# Altium PCB DetectorOptode.PcbDoc
Units mm, origin at the board's own origin, x right, y up, seen from the top; angles counter-clockwise.
Board outline 16 x 16 mm, 2 copper layers (Top Layer, Bottom Layer); 10 components, 7 nets, 32 pads, 11 vias.
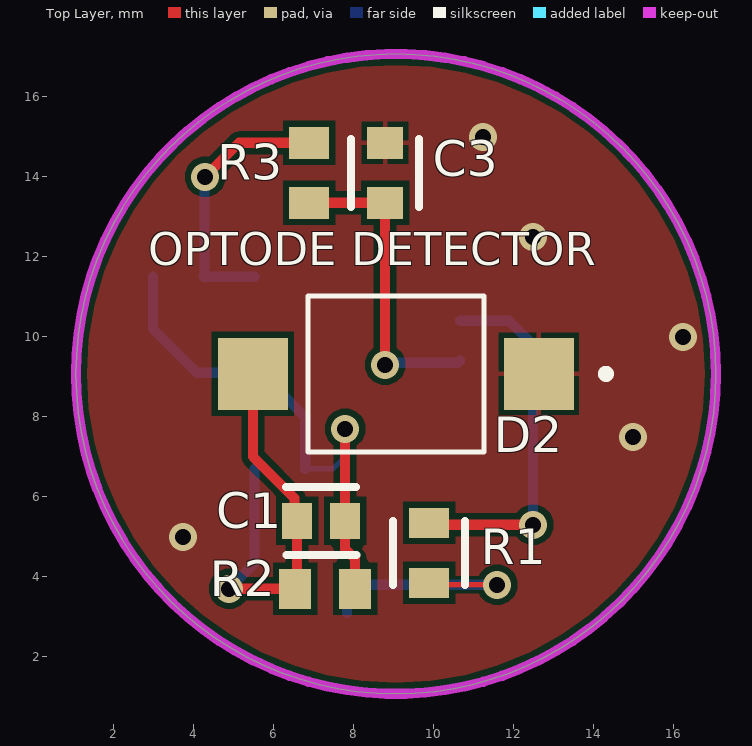
[diagram p0: Top Layer view]
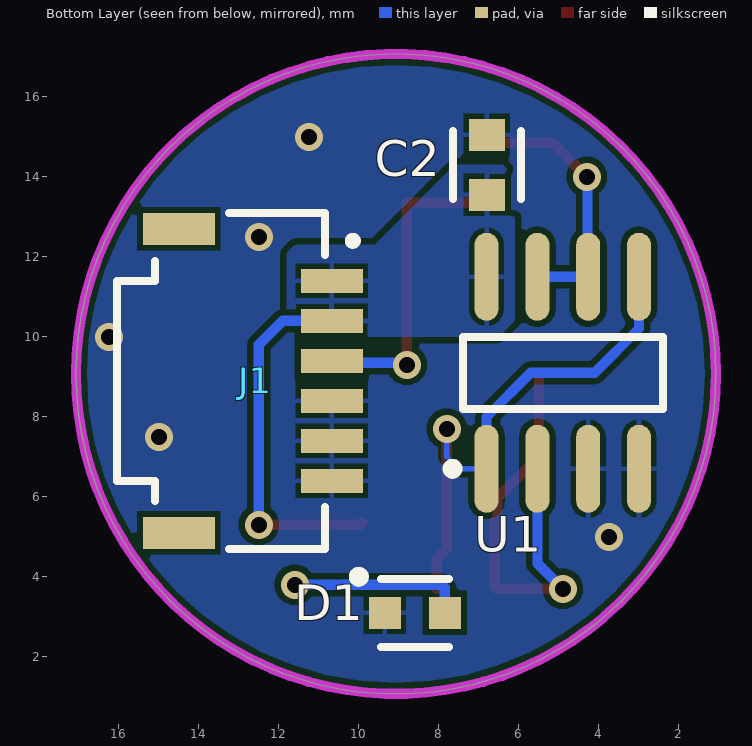
[diagram p1: Bottom Layer view, seen from below]
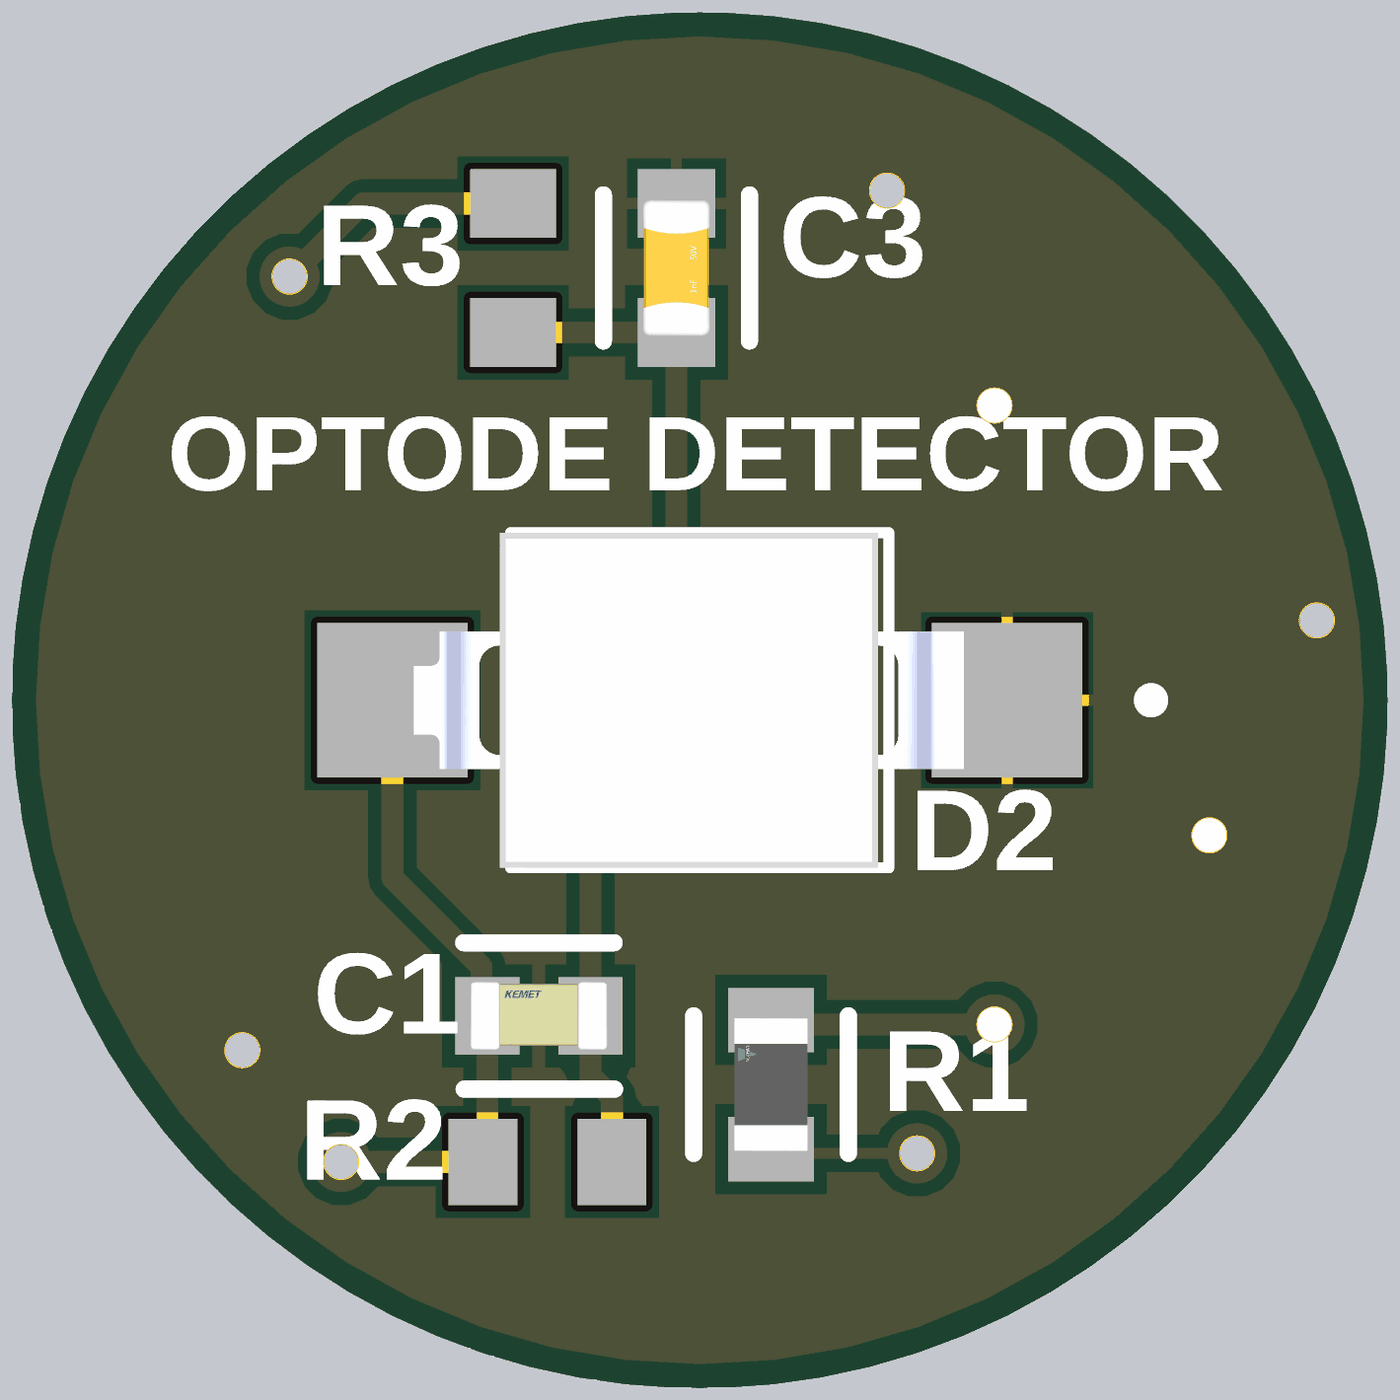
[diagram p2: 3D render of the assembled board from above, using the file's embedded part models]
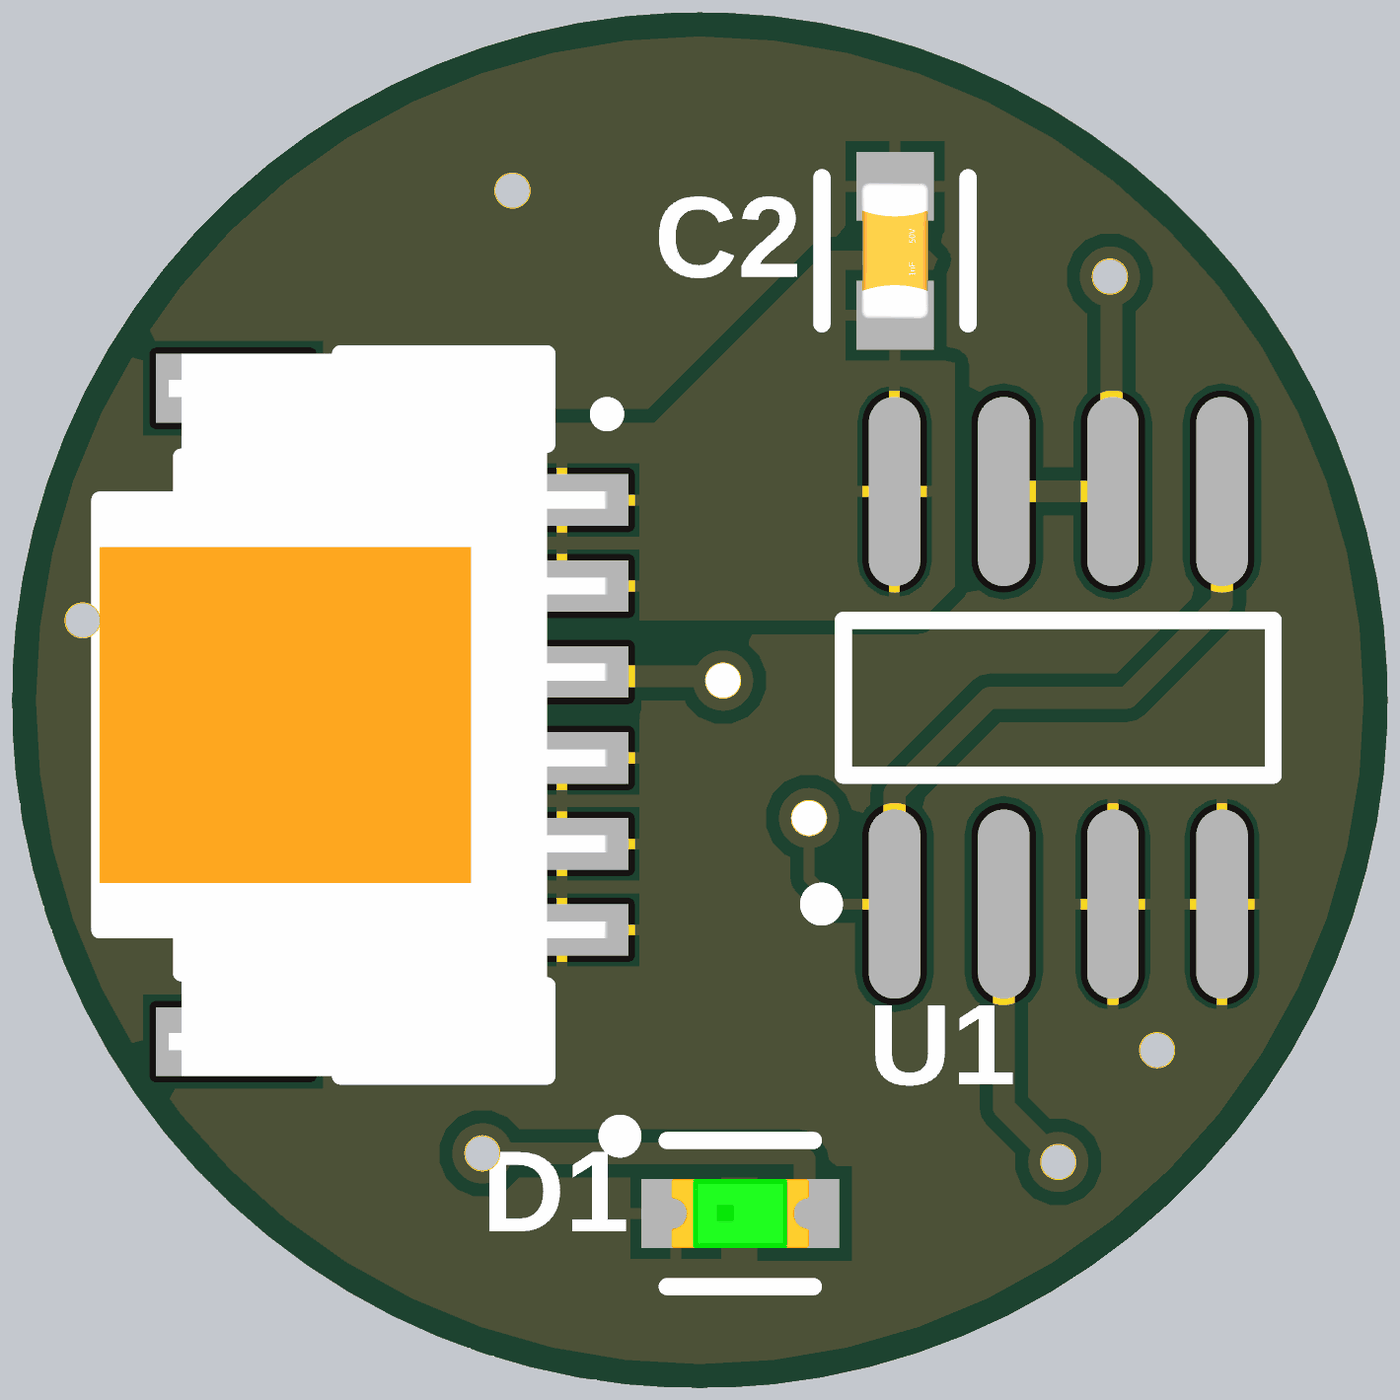
[diagram p3: 3D render of the assembled board from below, using the file's embedded part models]

## Layer stack, top to bottom
Top Solder: solder mask 0.0102, Solder Resist, Dk 3.5
Top Layer: signal copper 0.0356
Dielectric 1: dielectric 0.32, FR-4, Dk 4.8
Bottom Layer: signal copper 0.0356
Bottom Solder: solder mask 0.0102, Solder Resist, Dk 3.5

## Board outline
9.071,1.071 cw(c9.071,9.071) 1.071,9.071 cw(c9.071,9.071) 9.071,17.071 cw(c9.071,9.071) 17.071,9.071 cw(c9.071,9.071)

## Design rules (kind name [scope] priority, off if disabled: settings)
BoardOutlineClearance [All] p1: gap=0.2 ignorepadtopadclearanceinfootprint=FALSE
Clearance [All] p1: gap=0.15 ignorepadtopadclearanceinfootprint=FALSE except(0.127: Arc-Text Track-Text SMDPad-Text THPad-Text Via-Text Fill-Text Poly-Text Region-Text Text-Text; 0.25: Arc-Hole Track-Hole SMDPad-Hole THPad-Hole Via-Hole Fill-Hole Poly-Hole Region-Hole Text-Hole; 0.275: Arc-Via Track-Via SMDPad-Via THPad-Via Via-Via; 0.33: Arc-THPad Track-THPad)
ComponentClearance [All] p1: gap=0.127 collisioncheckmode=3 verticalgap=0.127 showdistances=TRUE
DiffPairsRouting [All] p1: maxlimit=0.254 minlimit=0.127 mostfreqgap=0.127 toplayer_minwidth=0.127 toplayer_maxwidth=25.4 toplayer_prefwidth=0.127 bottomlayer_minwidth=0.127 bottomlayer_maxwidth=25.4 bottomlayer_prefwidth=0.127 maxuncoupledlength=12.7
Height [All] p1: minheight=0 maxheight=1816.048 prefheight=12.7
HoleSize [All] p1: absolutevalues=TRUE maxlimit=6.3 minlimit=0.3 maxpercent=80.000 minpercent=20.000
HoleToHoleClearance [All] p1: gap=0.3 allowstackedmicrovias=FALSE
MinimumAnnularRing [All] p1: minimumring=0.076
MinimumSolderMaskSliver [All] p1: minsoldermaskwidth=0
PlaneClearance [All] p1: clearance=0.127
PlaneConnect PlaneConnectPowerPads [InPadClass('PowerPads')] p1: planeconnectstyle=Direct reliefexpansion=0.508 reliefentries=4 reliefconductorwidth=0.254 reliefairgap=0.254
PlaneConnect [All] p2: pad.planeconnectstyle=Relief pad.reliefexpansion=0.3 pad.reliefentries=4 pad.reliefconductorwidth=0.127 pad.reliefairgap=0.127 via.planeconnectstyle=Direct via.reliefexpansion=0.3 via.reliefentries=4 via.reliefconductorwidth=0.127 via.reliefairgap=0.127
PolygonConnect PolygonConnectPowerPads [All vs (InPadClass('PowerPads'))] p1: connectstyle=Direct reliefconductorwidth=0.254 reliefentries=4 polygonreliefangle="90 Angle" airgapwidth=0.254
PolygonConnect [All] p2: thpad.connectstyle=Relief thpad.reliefconductorwidth=0.127 thpad.reliefentries=4 thpad.polygonreliefangle="90 Angle" thpad.airgapwidth=0.127 smdpad.connectstyle=Relief smdpad.reliefconductorwidth=0.127 smdpad.reliefentries=4 smdpad.polygonreliefangle="90 Angle" smdpad.airgapwidth=0.127 via.connectstyle=Direct via.reliefconductorwidth=0.127 via.reliefentries=4 via.polygonreliefangle="90 Angle" via.airgapwidth=0.127
RoutingVias [All] p1: holewidth=0.3 width=0.6 viastyle="Through Hole" minholewidth=0.3 minwidth=0.6 maxholewidth=0.6 maxwidth=6.6
SilkToSilkClearance [All] p1: silktosilkclearance=0
SilkToSolderMaskClearance [IsPad] p1: minsilkscreentomaskgap=0.127 clearancetoexposedcopper=TRUE
SolderMaskExpansion [All] p1: expansion=0.075 istentingtop=FALSE
Width [All] p1: maxlimit=25.4 minlimit=0.127 preferedwidth=0.127 minimp=50.000000 maximp=50.000000 favimp=50.000000
20 further rules are at their usual default settings.

## Classes and differential pairs
component class DetectorOptode: C1 C2 C3 D1 D2 J1 R1 R2 R3

## Components (designator, comment, footprint, x,y, rotation, side; value= is the part's Value field where it differs from the comment)
C1 "C0603C201J5GACTU" FP-C0603C-CF-MFG 7.2,5.4 r0 top value="200 pF"
C2 "CC0603KRX7R7BB104" FP-CC0603-DA-MFG 6.8,14.3 r90 bottom value="100 nF"
C3 "CC0603KRX7R7BB104" FP-CC0603-DA-MFG 8.8,14.1 r90 top value="100 nF"
D1 "LTST-C190GKT" FP-LTST-C190GKT-MFG 8.6,3.1 r180 bottom
D2 "VBPW34S" XDCR_VBPW34S 9.071,9.071 r180 top
J1 "T1M-06-X-SH-L" SAMTEC_T1M-06-X-SH-L 10.85,8.9 r270 bottom
R1 "CRCW0603200RFKEA" FP-CRCW0603-e3-MFG 9.9,4.6 r90 top
R2 "RC0603FR-0760K4L" RESC1608X55X25ML10T15 7.3,3.7 r0 top
R3 "RC0603JR-070RL" RESC1608X55X25ML10T15 6.9,14.1 r270 top
U1 "AD8616ARZ-REEL" ADI-R-8_N 4.9,9.1 r90 bottom

## Footprints (in the part's own frame and the unit in brackets; to place one, negate y for a bottom-side part, rotate by r counter-clockwise, add the part's x,y. Pads: shape width x height; smd on the part's side, far side on the other; paste and mask are expansions set on the pad)
ADI-R-8_N [mm] "SOIC, 8-Leads, Body 4.9x3.9mm, Pitch 1.27mm, IPC Medium Density"
  oval 2.2x0.6 smd: 1(-2.4,1.905) 2(-2.4,0.635) 3(-2.4,-0.635) 4(-2.4,-1.905) 5(2.4,-1.905) 6(2.4,-0.635) 7(2.4,0.635) 8(2.4,1.905)
  silkscreen extent -2.52,-2.5 0.9,2.88, body extent 10.2,-4.9 14.2,0.1, height 1.75
FP-C0603C-CF-MFG [mm]
  rect 0.75x0.9 smd paste+0 mask+0: 1(-0.6,0) 2(0.6,0)
  silkscreen extent -0.87,-0.85 0.88,0.85, body extent -1.2,-0.6 1.2,0.6, height 0.25
FP-CC0603-DA-MFG [mm]
  rect 0.8x0.9 smd paste+0 mask+0: 1(-0.75,0) 2(0.75,0)
  silkscreen extent -0.85,-0.85 0.85,0.85, body extent -0.8,-0.4 0.8,0.4, height 0.9
FP-CRCW0603-e3-MFG [mm]
  rect 0.75x1 smd paste+0 mask+0: 1(-0.75,0) 2(0.75,0)
  silkscreen extent -0.8,-0.9 0.8,0.9, body extent -0.77,-0.43 0.77,0.43, height 0.5
FP-LTST-C190GKT-MFG [mm]
  rect 0.8x0.8 smd paste+0 mask+0: 1(-0.75,0) 2(0.75,0)
  silkscreen extent -1.53,-0.85 0.85,1.02, body extent -0.8,-0.4 0.8,0.4, height 0.9
RESC1608X55X25ML10T15 [mm] "Chip Resistor, 2-Leads, Body 1.60x0.80mm, IPC Low Density"
  rect 0.8x1 smd: 1(-0.75,0) 2(0.75,0)
  body extent -0.85,-0.45 0.85,0.45, height 0.55
SAMTEC_T1M-06-X-SH-L [mm]
  rect 0.6x1.55 smd: 01(-2.5,0.175) 02(-1.5,0.175) 03(-0.5,0.175) 04(0.5,0.175) 05(1.5,0.175) 06(2.5,0.175)
  rect 0.8x1.8 smd: S1(-3.8,-3.65) S2(3.8,-3.65)
  silkscreen extent -4.2,-5.2 4.2,0.8, body extent -4.2,-5.2 4.2,0.7, height 4.72
XDCR_VBPW34S [mm]
  rect 1.75x1.8 smd: A(3.575,0) K(-3.575,0)
  silkscreen extent -5.35,-1.95 2.2,1.95, body extent -3.07,-1.95 3.33,1.95, height 1.4

## Part data
C1: library part CMP-1035-01444-3, "CAP CER 200PF 50V 5% NP0 0603", Capacitance="200 pF", Manufacturer=KEMET, Package=C0603C-CF, Temperature="-55°C to +125°C", Temperature Characteristic=C0G, Temperature Coefficient=30ppm/°C, Temperature Range High=+125°C, Temperature Range Low=-55°C, Tolerance=0.05, Voltage Rating="50 V", Automotive=Yes, Automotive Grade="Grade 1", Category=Cap, ComponentLink2Description=Datasheet, ComponentLink2URL=https://api.kemet.com/component-edge/download/datasheet/C0603C100J5GACAUTO.pdf, Device Class L1="Passive Components", Device Class L2=Capacitors, Device Class L3="Ceramic Capacitors", Digikey Description="CAP CER 200PF 50V 5% NP0 0603", Height=0.87mm, Lead Free=Yes, Manufacturer Part Number=C0603C201J5GACTU, Material=Ceramic, Mouser Description="Multilayer Ceramic Capacitors MLCC - SMD/SMT 50volts 200pF C0G 5%", Octopart=https://octopart.com/c0603c201j5gactu-kemet-9143917, RoHS=TRUE
C2 C3: library part CMP-2000-05002-2, "CAP CER 0.1UF 16V X7R 0603", Capacitance="100 nF", Manufacturer=YAGEO, Package=CC0603-DA, Temperature="-55°C to +125°C", Temperature Characteristic=X7R, Temperature Coefficient=15%, Temperature Range High=+125°C, Temperature Range Low=-55°C, Tolerance=0.1, Voltage="16 V", Automotive=No, Category=Cap, ComponentLink2Description=Datasheet, ComponentLink2URL=http://www.yageo.com/documents/recent/UPY-GPHC_X7R_6.3V-to-50V_18.pdf, Device Class L1="Passive Components", Device Class L2=Capacitors, Device Class L3="Ceramic Capacitors", Digikey Description="CAP CER 0.1UF 16V X7R 0603", Footprint Url=http://www.yageo.com/exep/pages/download/literatures/UPY-C_GEN_24.pdf, Height=0.9mm, Lead Free=Yes, Manufacturer Part Number=CC0603KRX7R7BB104, Material=Ceramic, Mouser Description="Multilayer Ceramic Capacitor, CC Series, 0.1 - F, - 10%, X7R, 16 V, 0603 [1608 Metric]", Octopart=https://octopart.com/cc0603krx7r7bb104-yageo-192941, RoHS=TRUE, Voltage Rating="16 V"
D1: library part CMP-22017-000005-2, "LED GREEN CLEAR CHIP SMD", Case Code (Imperial)=0603, Case Code (Metric)=1608, Color=Green, Forward Current=30mA, Forward Voltage=2.1V, Lens Color=Colorless, Max Operating Temperature=85°C, Min Operating Temperature=-55°C, Package Quantity=1, Power Dissipation=100mW, Reverse Voltage=5V, Test Current=10mA, Voltage=2V, Case/Package=0603, Depth=0.8mm, Dominant Wavelength=569nm, Height=0.8mm, Illumination Color=Green, Lead Free="Lead Free", Length=1.6mm, Lens Style=Clear, Lens Transparency=Clear, Luminous Intensity=6mcd, Mount="Surface Mount", Number of Elements=1, Number of LEDs=1, Number of Pins=2, Packaging="Tape and Reel", Power Rating=100mW, Radiation Hardening=No, Viewing Angle=130°, Wavelength=565nm, Width=0.8mm
D2: "Photodiode 940nm 100ns 130Â° 2-SMD, Gull Wing", Package="SMD-2 Vishay", Availability=Unavailable, MF=Vishay, MP=VBPW34S, Price=None, SnapEDA_Link=https://www.snapeda.com/parts/VBPW34S/Vishay%20Semiconductor%20Opto%20Division/view-part/139260/?ref=snap
J1: "Connector Header Surface Mount, Right Angle 6 position 0.039\" (1.00mm)", Package=None, Availability=Unavailable, MF=Samtec, MP=T1M-06-X-SH-L, Price=None
R1: library part CMP-2000-03062-2, "RES Thick Film, 200Ω, 1%, 0.1W, 100ppm/°C, 0603", Case Code (Imperial)=0603, Case Code (Metric)=1608, Max Operating Temperature=155°C, Min Operating Temperature=-55°C, Package Quantity=5000, Power Rating=100mW, Resistance=200R, Temperature Coefficient=100ppm/°C, Tolerance=1%, Voltage Rating=75V, Case/Package=0603, Composition="Thick Film", Contact Plating=Tin, Depth=0.85mm, Height=0.45mm, Lead Free="Lead Free", Length=1.55mm, Military Standard=Not, Number of Pins=2, Packaging="Tape and Reel", Termination=SMD/SMT, Voltage Rating (DC)=75V, Weight=7.1E-05oz, Width=0.85mm
R2: library part CMP-2000-04099-1, Manufacturer=Yageo, Resistance=60.4k, Part Number=RC0603FR-0760K4L
R3: library part CMP-2100-03667-1, "Chip Resistor, 0 Ohm, +/- 5%, 0.1 W, -55 to 155 degC, 0603 (1608 Metric), RoHS, Tape and Reel", Case Code (Imperial)=0603, Case Code (Metric)=1608, Manufacturer=Yageo, Max Operating Temperature=155degC, Min Operating Temperature=-55degC, Package Description="2-Pin Surface Mount Device, Body 1.6 x 0.8 mm", Package Quantity=5000, Power Rating=100mW, Resistance=0mOhm, Temperature Coefficient=200ppm/degreesC, Tolerance=5%, Voltage Rating=50V, Case/Package=0603, Composition=ThickFilm, Contact Plating=Tin, Datasheet URL=http://www.yageo.com/NewPortal/yageodocoutput?fileName=/pdf/R-Chip/PYu-RC_Group_51_RoHS_L_5.pdf, Datasheet Version="Rev. 5, 10/2016", Depth=0.8mm, Height=0.45mm, Lead Free=LeadFree, Length=1.6mm, Manufacturer URL=http://www.yageo.com/, Military Standard=Not, Number of Pins=2, Package Reference=0603, Packaging=TapeandReel, Radiation Hardening=No, REACH SVHC=NoSVHC, RoHSCompliant=true, Termination=SMD/SMT, Voltage Rating (DC)=50V, Width=0.8mm
U1: library part CMP-0384-00619-1, "Double Channel Wide Bandwidth Operational Amplifier, 24 MHz BW, 12 V/us SR, Industrial, 8-pin SOIC (R-8), Reel", Amplifiers Per Package=2, Generic Part Number=AD8616, Input Bias Current=200fA, Input Offset Voltage=23uV, Manufacturer="Analog Devices", Code_JEDEC=MS-012-AA, ComponentLink1Description="Manufacturer URL", ComponentLink1URL=http://www.analog.com/en/index.html, ComponentLink2Description=Datasheet, ComponentLink2URL=http://www.analog.com/static/imported-files/data_sheets/AD8615_8616_8618.pdf, ComponentLink3Description="Package Specification", ComponentLink3URL=http://www.analog.com/static/imported-files/packages/PKG_PDF/SOIC_Narrow%20(R)/R_8.pdf, DatasheetVersion="Rev. E", Iq/Amp=2mA, Mounting Technology="Surface Mount", PackageDescription="8-Pin Standard Small Outline Package, Body 3.9 x 4.9 mm, Pitch 1.27 mm", PackageReference=R-8, PackageVersion=060506-A, PartNumber=AD8616ARZ-REEL, Slew Rate=12V/us, Small Signal Bandwidth=24MHz, V Span Max=6V, V Span Min=2.7V

## Via types
v1: diameter 0.7, hole 0.4, Top Layer to Bottom Layer, tented both sides, 11 vias

## Nets (pads, with @x,y where several pads share a name; then routed paths per layer and width w, separated by ;. In a path a pad name is that pad's centre, name@x,y a point inside that pad or via, vN(x,y) a via of type N, cw(c..) or ccw(c..) an arc to the next point about the centre after c; other vN are vias at no path point)
3V3: C2.1 J1.01 J1.02 R1.2 U1.8 | length 9.2
  Top Layer w0.254: R1.2 9.95,5.3 v1(12.5,5.3)
  Bottom Layer w0.254: J1.02 11.9,10.4 12.5,9.8 v1(12.5,5.3)
GND: C2.2 C3.2 D1.1 D2.K J1.04 J1.05 J1.06 U1.3 U1.4
  other v1: 3.75,5 15,7.5 16.25,10 12.5,12.5 11.25,15
NetC1_1: C1.1 D2.A R2.1 U1.2 | length 10.8
  Top Layer w0.254: v1(4.9,3.7) R2.1 6.6,3.75 C1.1 6.534,5.466 6.534,5.966 5.496,7.004 D2.A
  Bottom Layer w0.254: v1(4.9,3.7) 5.535,4.335 U1.2
NetC1_2: C1.2 R2.2 U1.1 U1.5 | length 13.2
  Top Layer w0.254: v1(7.8,7.7) C1.2 7.8,4.7 8.05,4.45 R2.2
  Bottom Layer w0.127: U1.1 7.5,6.7 7.8,7 v1(7.8,7.7)
  Bottom Layer w0.254: U1.5 2.995,10.205 4.1,9.1 5.7,9.1 6.805,7.995 U1.1
NetD1_2: D1.2 R1.1 | length 6.1
  Top Layer w0.127: R1.1 9.95,3.8 v1(11.6,3.8)
  Bottom Layer w0.254: D1.2 7.85,3.726 7.924,3.8 v1(11.6,3.8)
NetR3_1: R3.1 U1.6 U1.7 | length 6.7
  Top Layer w0.254: v1(4.3,14) 5.15,14.85 R3.1
  Bottom Layer w0.254: v1(4.3,14) 4.283,13.983 4.283,11.518 U1.6 U1.7
OptodeOutputVoltage: C3.1 J1.03 R3.2 | length 7.9
  Top Layer w0.254: R3.2 C3.1 v1(8.8,9.3)
  Bottom Layer w0.254: v1(8.8,9.3) 8.85,9.35 10.625,9.35 J1.03
pads on no net: J1.S1 J1.S2

## Polygon pours and split planes (outlines as drawn)
GND on Bottom Layer "GND_L02_P005" (solid, pour order 5): 9.071,1.071 cw(c9.071,9.071) 1.071,9.071 cw(c9.071,9.071) 9.071,17.071 cw(c9.071,9.071) 17.071,9.071 cw(c9.071,9.071)
3V3 on Bottom Layer "3V3_L02_P000" (solid, pour order 0): 6.5,10 6.1,10.4 6.1,14 6.4,14.3 7.6,14.3 9.6,12.3 11.6,12.3 11.8,12.1 11.8,10.2 11.6,10
GND on Top Layer "GND_L01_P004" (solid, pour order 4): 9.071,1.071 cw(c9.071,9.071) 1.071,9.071 cw(c9.071,9.071) 9.071,17.071 cw(c9.071,9.071) 17.071,9.071 cw(c9.071,9.071)
GND on Top Layer "GND_L01_P003" (solid, pour order 3): 9.071,1.071 cw(c9.071,9.071) 1.071,9.071 cw(c9.071,9.071) 9.071,17.071 cw(c9.071,9.071) 17.071,9.071 cw(c9.071,9.071)

## Keep-outs
Keep-Out Layer:
  circle w0.254: c9.071,9.071 r8

## Silkscreen, mask and mechanical layers (free items; w line width, h text height)
Top Overlay:
  text "OPTODE DETECTOR" at 2.878,11.515 h1.4